# Altium PCB Pressure Sensor.PcbDoc
Units mil, origin at the board's own origin, x right, y up, seen from the top; angles counter-clockwise.
Board outline 1000 x 1000 mil, 2 copper layers (Top Layer, Bottom Layer), stack 61.756 mil thick; 2 components, 5 nets, 17 pads, 0 vias.
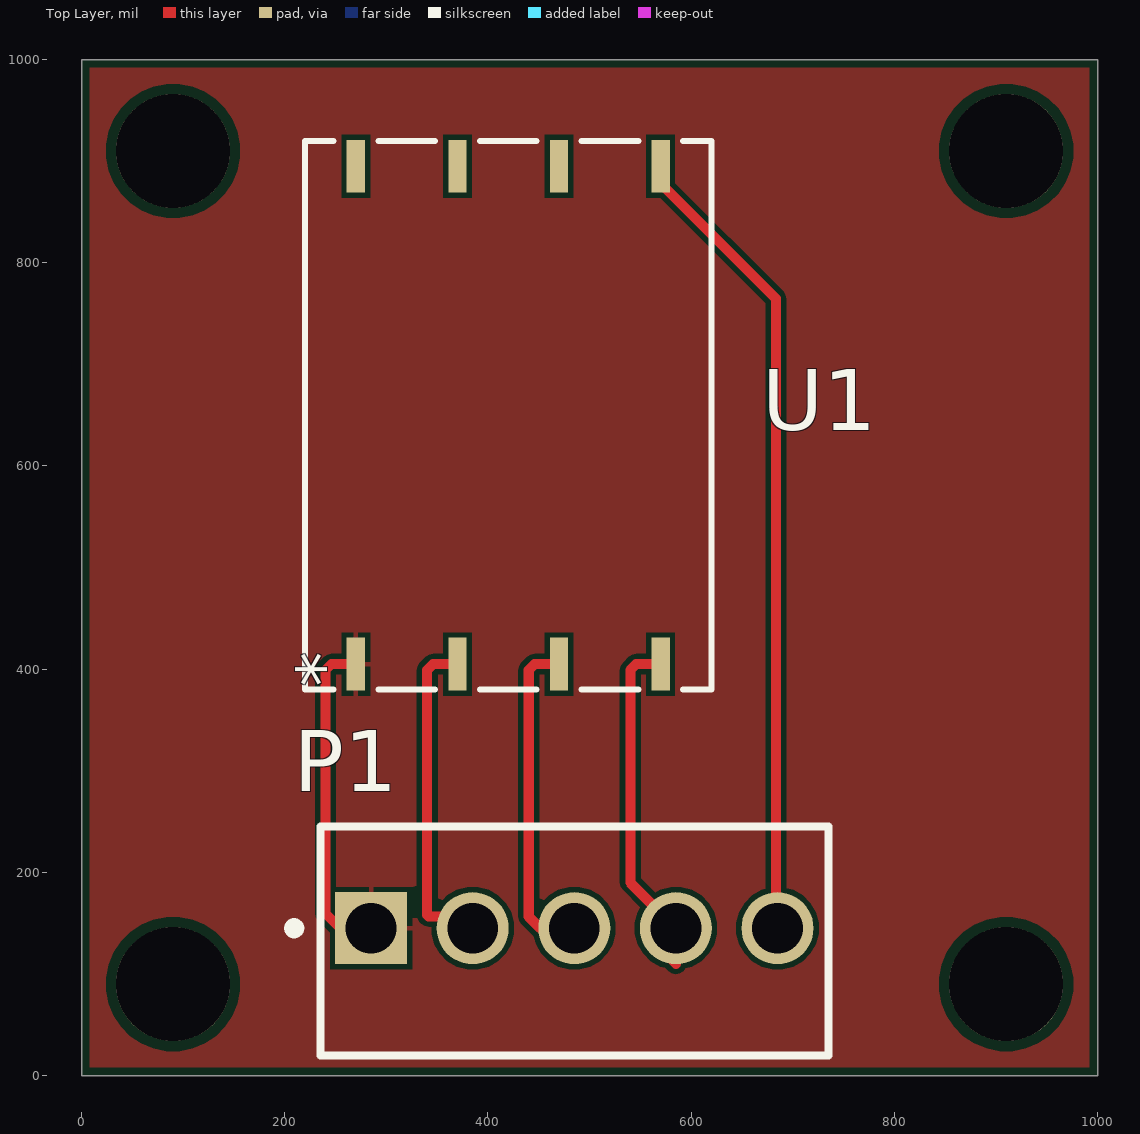
[diagram p0: Top Layer view]
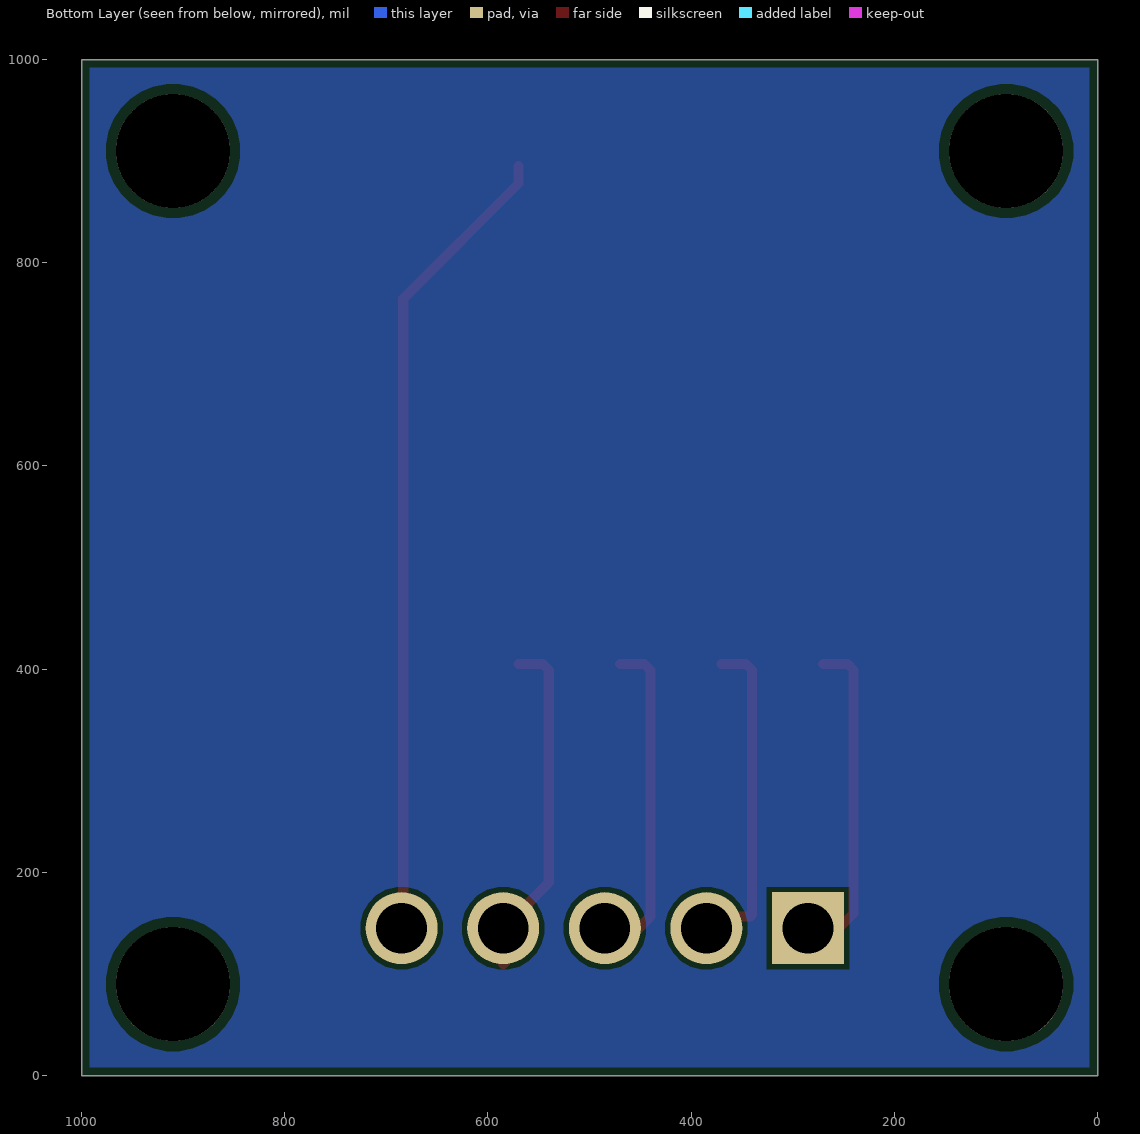
[diagram p1: Bottom Layer view, seen from below]

## Layer stack, top to bottom
Top Solder: solder mask 1, SM-001, Dk 4
Top Layer: signal copper 1.378
Dielectric 1: core 59, Core-043, Dk 4.3
Bottom Layer: signal copper 1.378
Bottom Solder: solder mask 1, SM-001, Dk 4

## Board outline
0,0 1000,0 1000,1000 0,1000

## Design rules (kind name [scope] priority, off if disabled: settings)
BoardOutlineClearance [All] p1: gap=7.87 ignorepadtopadclearanceinfootprint=FALSE
Clearance [All] p1: gap=5 ignorepadtopadclearanceinfootprint=FALSE except(9.84: Arc-Hole Track-Hole SMDPad-Hole THPad-Hole Via-Hole Fill-Hole Poly-Hole Region-Hole Text-Hole)
ComponentClearance [All] p1: gap=5 collisioncheckmode=3 verticalgap=5 showdistances=TRUE
DiffPairsRouting [All] p1: maxlimit=10 minlimit=5 mostfreqgap=5 toplayer_minwidth=5 toplayer_maxwidth=1000 toplayer_prefwidth=5 bottomlayer_minwidth=5 bottomlayer_maxwidth=1000 bottomlayer_prefwidth=5 maxuncoupledlength=500
Height [All] p1: minheight=0 maxheight=71497.94 prefheight=500
HoleSize [All] p1: absolutevalues=TRUE maxlimit=248.03 minlimit=11.81 maxpercent=80.000 minpercent=20.000
HoleToHoleClearance [All] p1: gap=9.84 allowstackedmicrovias=FALSE
MinimumAnnularRing [All] p1: minimumring=3
MinimumSolderMaskSliver [All] p1: minsoldermaskwidth=0
PlaneClearance [All] p1: clearance=5
PlaneConnect PlaneConnectPowerPads [InPadClass('PowerPads')] p1: planeconnectstyle=Direct reliefexpansion=20 reliefentries=4 reliefconductorwidth=10 reliefairgap=10
PlaneConnect [All] p2: pad.planeconnectstyle=Relief pad.reliefexpansion=11.81 pad.reliefentries=4 pad.reliefconductorwidth=5 pad.reliefairgap=5 via.planeconnectstyle=Direct via.reliefexpansion=11.81 via.reliefentries=4 via.reliefconductorwidth=5 via.reliefairgap=5
PolygonConnect PolygonConnectPowerPads [All vs (InPadClass('PowerPads'))] p1: connectstyle=Direct reliefconductorwidth=10 reliefentries=4 polygonreliefangle="90 Angle" airgapwidth=10
PolygonConnect [All] p2: thpad.connectstyle=Relief thpad.reliefconductorwidth=5 thpad.reliefentries=4 thpad.polygonreliefangle="90 Angle" thpad.airgapwidth=5 smdpad.connectstyle=Relief smdpad.reliefconductorwidth=5 smdpad.reliefentries=4 smdpad.polygonreliefangle="90 Angle" smdpad.airgapwidth=5 via.connectstyle=Direct via.reliefconductorwidth=5 via.reliefentries=4 via.polygonreliefangle="90 Angle" via.airgapwidth=5
RoutingVias [All] p1: holewidth=11.81 width=23.62 viastyle="Through Hole" minholewidth=11.81 minwidth=23.62 maxholewidth=23.62 maxwidth=259.84
SilkToSilkClearance [All] p1: silktosilkclearance=0
SilkToSolderMaskClearance [IsPad] p1: minsilkscreentomaskgap=5 clearancetoexposedcopper=TRUE
SolderMaskExpansion [All] p1: expansion=2.95 istentingtop=FALSE
Width [All] p1: maxlimit=1000 minlimit=5 preferedwidth=5 minimp=50.000000 maximp=50.000000 favimp=50.000000
20 further rules are at their usual default settings.

## Components (designator, comment, footprint, x,y, rotation, side; value= is the part's Value field where it differs from the comment)
P1 "640456-5" TECO-640456-5 485,145 r180 top
U1 "SSCMNNN030PA2A3" SSCMNN_HNW-L 420,650 r90 top

## Footprints (in the part's own frame and the unit in brackets; to place one, negate y for a bottom-side part, rotate by r counter-clockwise, add the part's x,y. Pads: shape width x height; smd on the part's side, far side on the other; paste and mask are expansions set on the pad)
SSCMNN_HNW-L [mil]
  rect 52x18 smd paste+0 mask+0: 1(-245,150) 2(-245,50) 3(-245,-50) 4(-245,-150) 5(245,-150) 6(245,-50) 7(245,50) 8(245,150)
  silkscreen extent -270,-200 270,200, body extent 0,0 10,10, height 10
TECO-640456-5 [mm] "Through Hole, 5-Leads, Body 12.7x5.72mm, Pitch 2.54mm"
  rect 1.8x1.8 hole 1.27 paste+0: 1(5.08,0)
  round 1.8 hole 1.27 paste+0: 2(2.54,0) 3(0,0) 4(-2.54,0) 5(-5.08,0)
  silkscreen extent -6.35,-2.54 7.13,3.18, body extent -6.35,-2.67 6.35,3.18, height 10.29

## Part data
P1: library part CMP-1684-00014-1, "Male Header, Pitch 2.54 mm, 1 x 5 Position, Height 10.03 mm, Tail Length 3.56 mm,  / -55 to 105 degC, RoHS, Bulk", Color=White, Current, Rating="5 /  / A", Flammability Rating=UL94V-0, Manufacturer="TE Connectivity", Package Description="Male Header, Pitch 2.54 mm, 1 x 5 Position, Height 10.03 mm, Tail Length 3.56 mm", Package Reference=THD, Temperature, Operating="-55to+105 /  / °C", Voltage, Rating="250 /  / V", Agency Approvals=CSA,UL, Angle=Straight, Brand/Series=MTA-100Series, Color, Housing=White, Connector Type=MTA-100, Contact Centerline Spacing="0.100 /  / in.", Contact Mating Area Plating=Tin, Contact Plating=Tin, Contact Shape=Square, Contact Termination Area Plating=Tin, Datasheet URL=http://sigma.octopart.com/77881742/technical_drawing/TE-Connectivity-640456-5.pdf, Datasheet Version="Rev. W3", Length, Overall="0.5 /  / \"", Length, Pin="0.14 /  / \"", Length, Terminal Post="0.14 /  / in.", Manufacturer URL=http://www.te.com, Material, Contact=CopperAlloy, Material, Housing=Polyester, Mount Angle=Vertical, Mounting Hole Size="0.04 /  / \"", Mounting Type=PCMount, Number Of Contacts=5, Number of Positions=5, Number of Rows=1, Pin Spacing="0.1 /  / \"", Primary Type=InterconnectSystem, Size, Post="0.025 /  / in.", Special Features=Pinstrip, Standards=RoHSCompliant,ELVCompliant,UL94V-0, Termination=Solder, Type=PCBPlug
U1: "No Description Available", Built_By=EMA_Cory, Copyright="Copyright (C) 2018 Accelerated Designs. All rights reserved", Datasheet=https://sensing.honeywell.com/honeywell-sensing-trustability-ssc-series-standard-accuracy-board-mount-pressure-sensors-50099533-a-en.pdf, Manufacturer_Part_Number=SSCMNNN030PA2A3, RefDes=RefDes, SourceLibrary=Honeywell_2020-09-30, Type=DEV, Vendor=Honeywell

## Free pads (board coordinates)
  round 112 hole 112 unplated: 6(90,90) 6(90,910) 6(910,90) 6(910,910)

## Nets (pads, with @x,y where several pads share a name; then routed paths per layer and width w, separated by ;. In a path a pad name is that pad's centre, name@x,y a point inside that pad or via, vN(x,y) a via of type N, cw(c..) or ccw(c..) an arc to the next point about the centre after c; other vN are vias at no path point)
3V3: P1.2 U1.2 | length 323.7
  Top Layer w10: U1.2 346,405 340.14,399.14 340.14,158 341.49,156.65 373.35,156.65 P1.2
GND: P1.1 U1.1 | length 387
  Top Layer w10: U1.1 246,405 240.14,399.14 240.14,159.57 P1.1@269.86,129.86 ; P1.1@269.86,129.86 285,114.71 P1.1 P1.1@269.86,129.86
MISO: P1.3 U1.3 | length 324.6
  Top Layer w10: U1.3 446,405 440.14,399.14 440.14,156.43 451.57,145 P1.3
SCK: P1.4 U1.4 | length 364.8
  Top Layer w10: P1.4@567.5,127.5 585,110 P1.4 540.14,189.86 540.14,399.14 546,405 U1.4
SS: P1.5 U1.5 | length 797.6
  Top Layer w10: U1.5 570,878 683.43,764.57 683.43,146.57 P1.5
pads on no net: U1.6 U1.7 U1.8

## Polygon pours and split planes (outlines as drawn)
no net on Bottom Layer "NONET_L02_P000" (solid, pour order 0): 0,0 0,1000 1000,1000 1000,0
GND on Top Layer "GND_L01_P001" (solid, pour order 1): 0,1000 0,0 1000,0 1000,1000

## Text inside footprints (layer, text, board x,y; h text height)
U1: Top Overlay "*" at 261,382.5 h50 r90; Mechanical 7 "0.53in/13.462mm" at 130,556.25 h25 r90; Mechanical 7 "0.1in/2.54mm" at 332.5,135 h25 r90; Mechanical 7 "0.05in/1.27mm" at 735,328.75 h25 r90; Mechanical 13 "*" at 302,412.5 h50 r90